# EAGLE board authenticator_breakout (EAGLE 6.3)
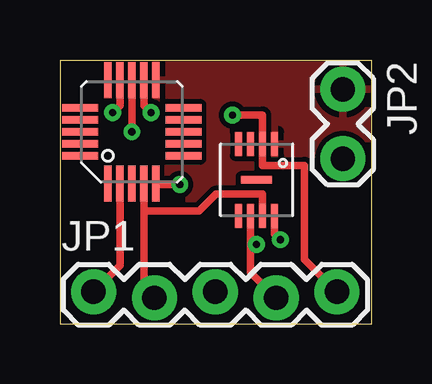
[diagram p0: board, top side]
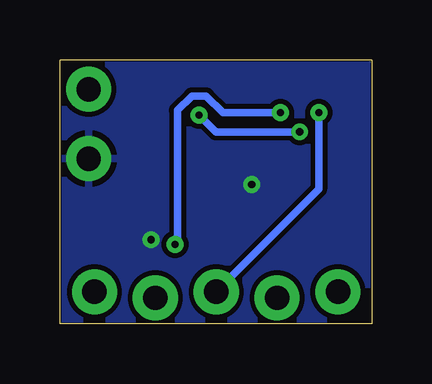
[diagram p1: board, bottom side, seen from below]

Size 13 x 11 mm. Coordinates in mm from the lower left corner, seen from the top.
Outline: 13,0 13,11 0,11 0,0 13,0
Copper layers (1*16): Top 0.035mm / dielectric 1.5mm / Bottom 0.035mm
Design rules "default *": minimum track width 10mil, minimum drill 24mil, track to track 8mil, track to pad 8mil, pad to pad 8mil, via to via 8mil, smd to smd 8mil, copper to edge 2mil, drill to drill 8mil, minimum pad ring 10mil, minimum via ring 8mil, stop-mask expansion 4mil, vias tented up to drill 0mil, thermal gap 10mil

## Footprints (pad centres in the part's own frame; a part is rotated, then mirrored left to right if it is on the bottom)
1X05_LOCK = drill 1.016 pad 1.88: 1 0,0.127; 2 2.54,-0.127; 3 5.08,0.127; 4 7.62,-0.127; 5 10.16,0.127
1X02_LOCK = drill 1.016 pad 1.88: 1 -0.178,0; 2 2.718,0
AUTH_QFN20 = smd 0.3 x 1.5: P$1 -1,-2.15; P$2 -0.5,-2.15; P$3 0,-2.15; P$4 0.5,-2.15; P$5 1,-2.15; P$11 1,2.15; P$12 0.5,2.15; P$13 0,2.15; P$14 -0.5,2.15; P$15 -1,2.15 | smd 1.5 x 0.3: P$6 2.15,-1; P$7 2.15,-0.5; P$8 2.15,0; P$9 2.15,0.5; P$10 2.15,1; P$16 -2.15,1; P$17 -2.15,0.5; P$18 -2.15,0; P$19 -2.15,-0.5; P$20 -2.15,-1
AUTH_SQC = smd 0.3 x 1: P$1 -0.75,-1.5; P$2 -0.25,-1.5; P$3 0.25,-1.5; P$4 0.75,-1.5; P$5 0.75,1.5; P$6 0.25,1.5; P$7 -0.25,1.5; P$8 -0.75,1.5 | smd 1.3 x 0.3: P$9 0,0

## Placement (x,y rotation side)
JP1  [1X05_LOCK]  1.4,1.2 0 top
JP2  [1X02_LOCK]  11.8,9.6 270 top
U$2  AUTHENTICATORQFN  [AUTH_QFN20]  3,8 0 top
U$4  AUTHENTICATOR_2C  [AUTH_SQC]  8.2,6 180 top

## Library data of the parts
JP1 JP2 = SparkFun-Connectors
U$2 U$4 = corona

## Nets
!AUTH_RESET: JP1.2 U$2.P$4 U$4.P$7
+3V3: JP2.2 U$2.P$5 U$4.P$8
GND: JP2.1 U$2.P$11 U$4.P$1
MODE0: JP1.3 U$2.P$14
MODE1: JP1.1 U$2.P$2
SCL: JP1.4 U$2.P$12 U$4.P$6
SDA: JP1.5 U$2.P$13 U$4.P$2

## Tracks (layer width: path | path; a pad name or v marks a point on that pad's centre or on a via)
!AUTH_RESET
  Top 0.305: U$2.P$4 3.5,4.7 | 3.5,4.7 3.5,1.51 JP1.2 | U$4.P$7 8.45,5.4 6.5,5.4 5.8,4.7 3.5,4.7
+3V3  (via drill 0.3)
  Top 0.305: U$2.P$5 4.05,5.8 v5,5.8 | U$4.P$8 8.95,3.75 v9.2,3.5
  pour Bottom: 0,0 13,0 13,11 0,11
GND
  pour Top: 0,0 13,0 13,11 0,11
MODE0  (via drill 0.3)
  Top 0.305: U$2.P$14 2.5,9.1 v2.2,8.8
  Bottom 0.305: v2.2,8.8 2.2,5.61 JP1.3
MODE1
  Top 0.305: U$2.P$2 2.5,2.43 JP1.1
SCL  (via drill 0.3)
  Top 0.305: U$4.P$6 7.95,3.5 | 7.95,3.5 7.95,2.14 JP1.4 | U$2.P$12 3.5,9.1 v3.8,8.8 | v8.2,3.3 8.15,3.3 7.95,3.5
  Bottom 0.305: v3.8,8.8 6.2,8.8 6.9,9.5 7.5,9.5 8.1,8.9 8.1,3.4 v8.2,3.3
SDA  (via drill 0.3)
  Top 0.305: U$2.P$13 v3,8 | v7.2,8.7 8.45,8.7 U$4.P$2 8.45,6.6 10.2,6.6 10.2,2.69 JP1.5
  Bottom 0.305: v3,8 6.5,8 v7.2,8.7